# EAGLE board headstage-64-coax-adapter_panel (EAGLE 8.3.2), part 1 of 2
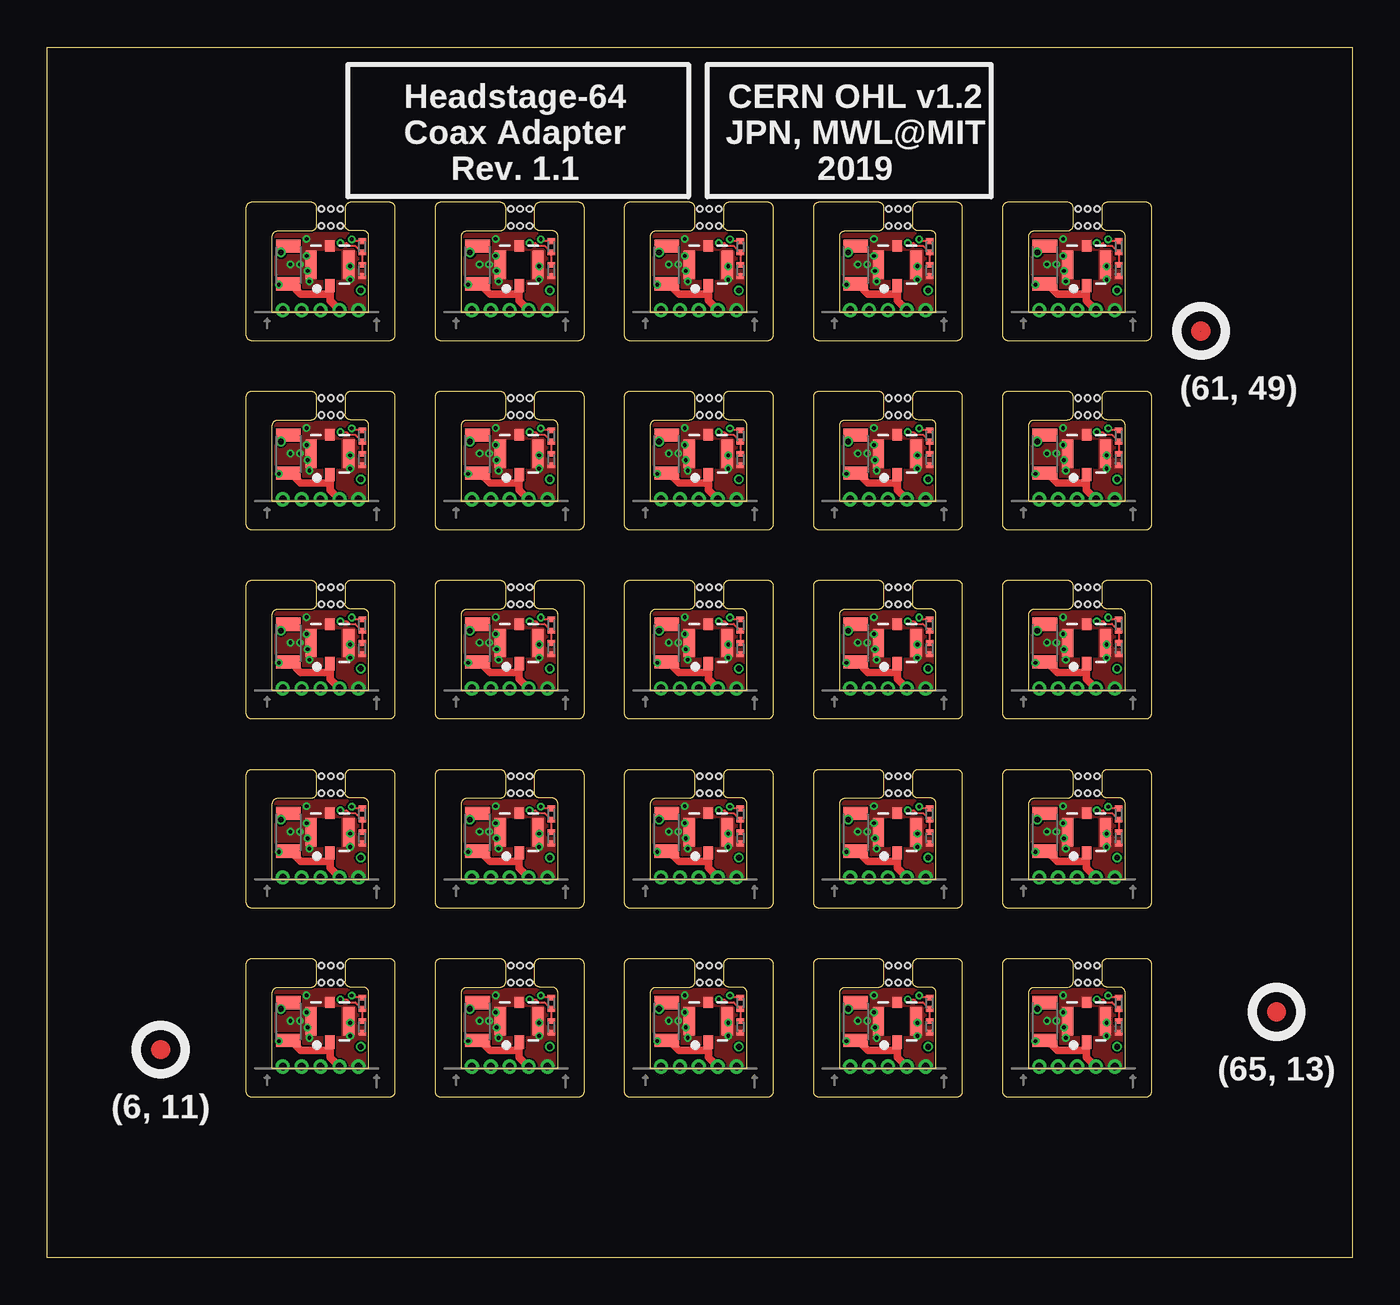
[diagram p0: board, top side]
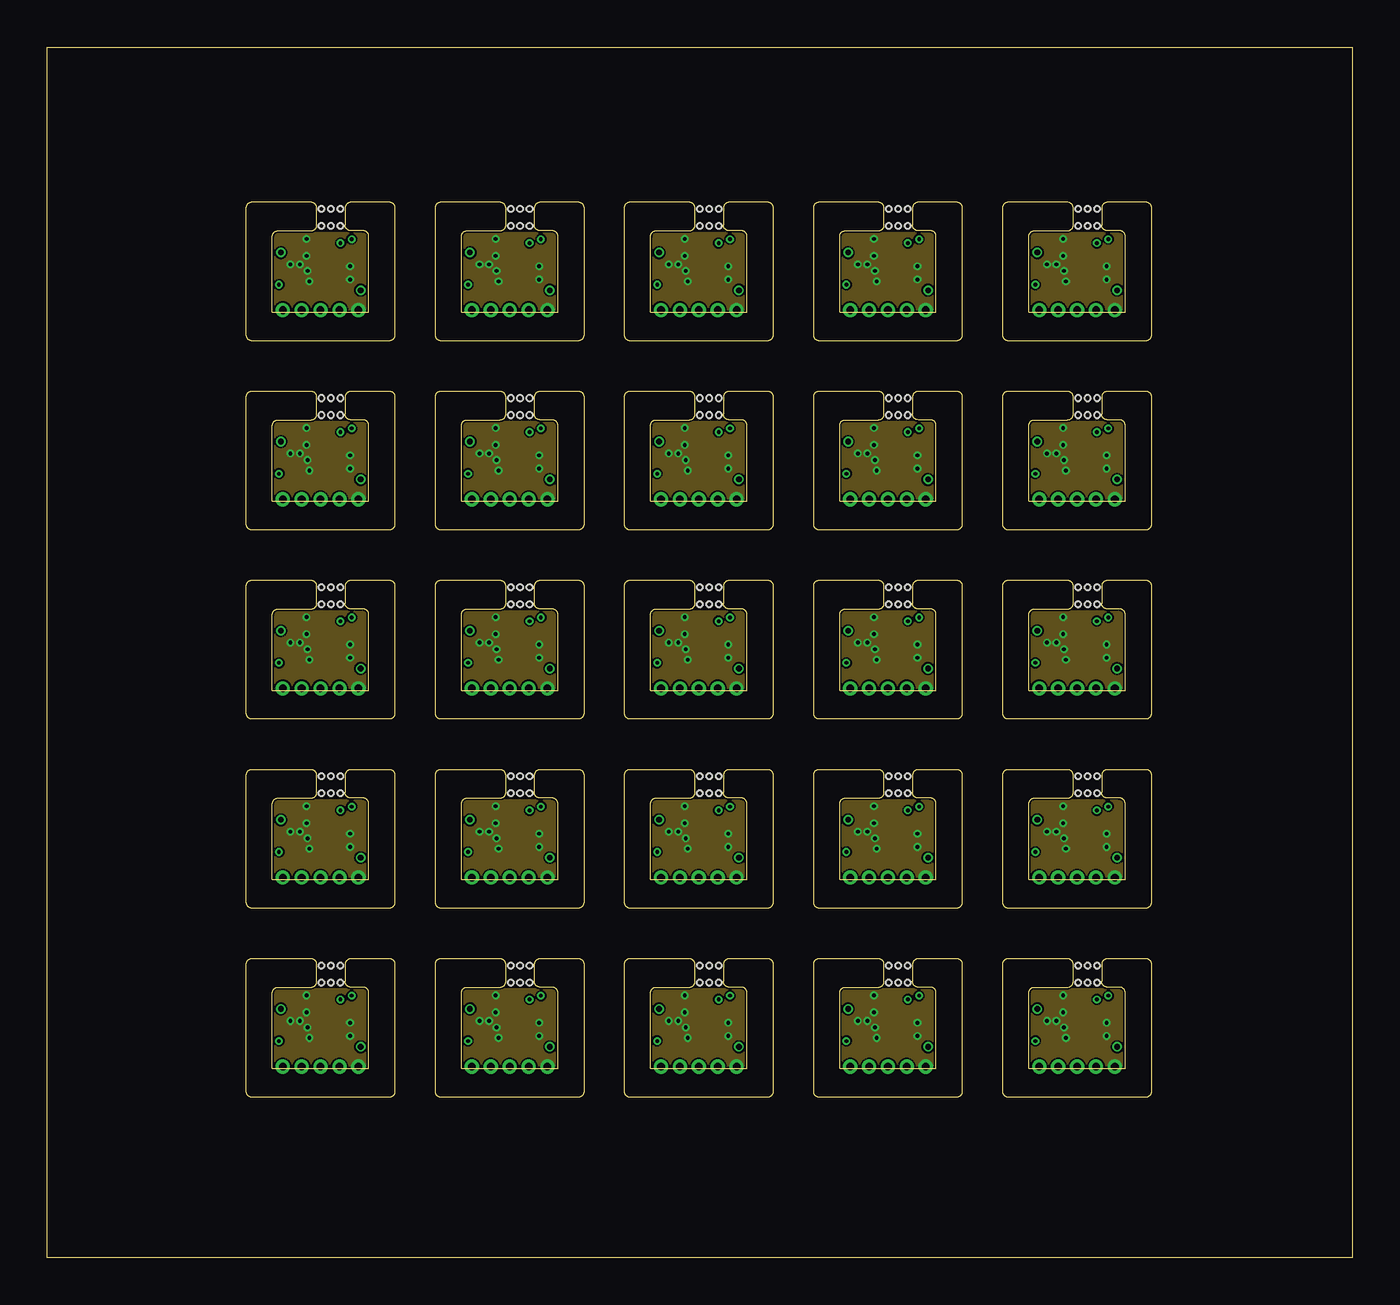
[diagram p1: board, inner layer Route2]
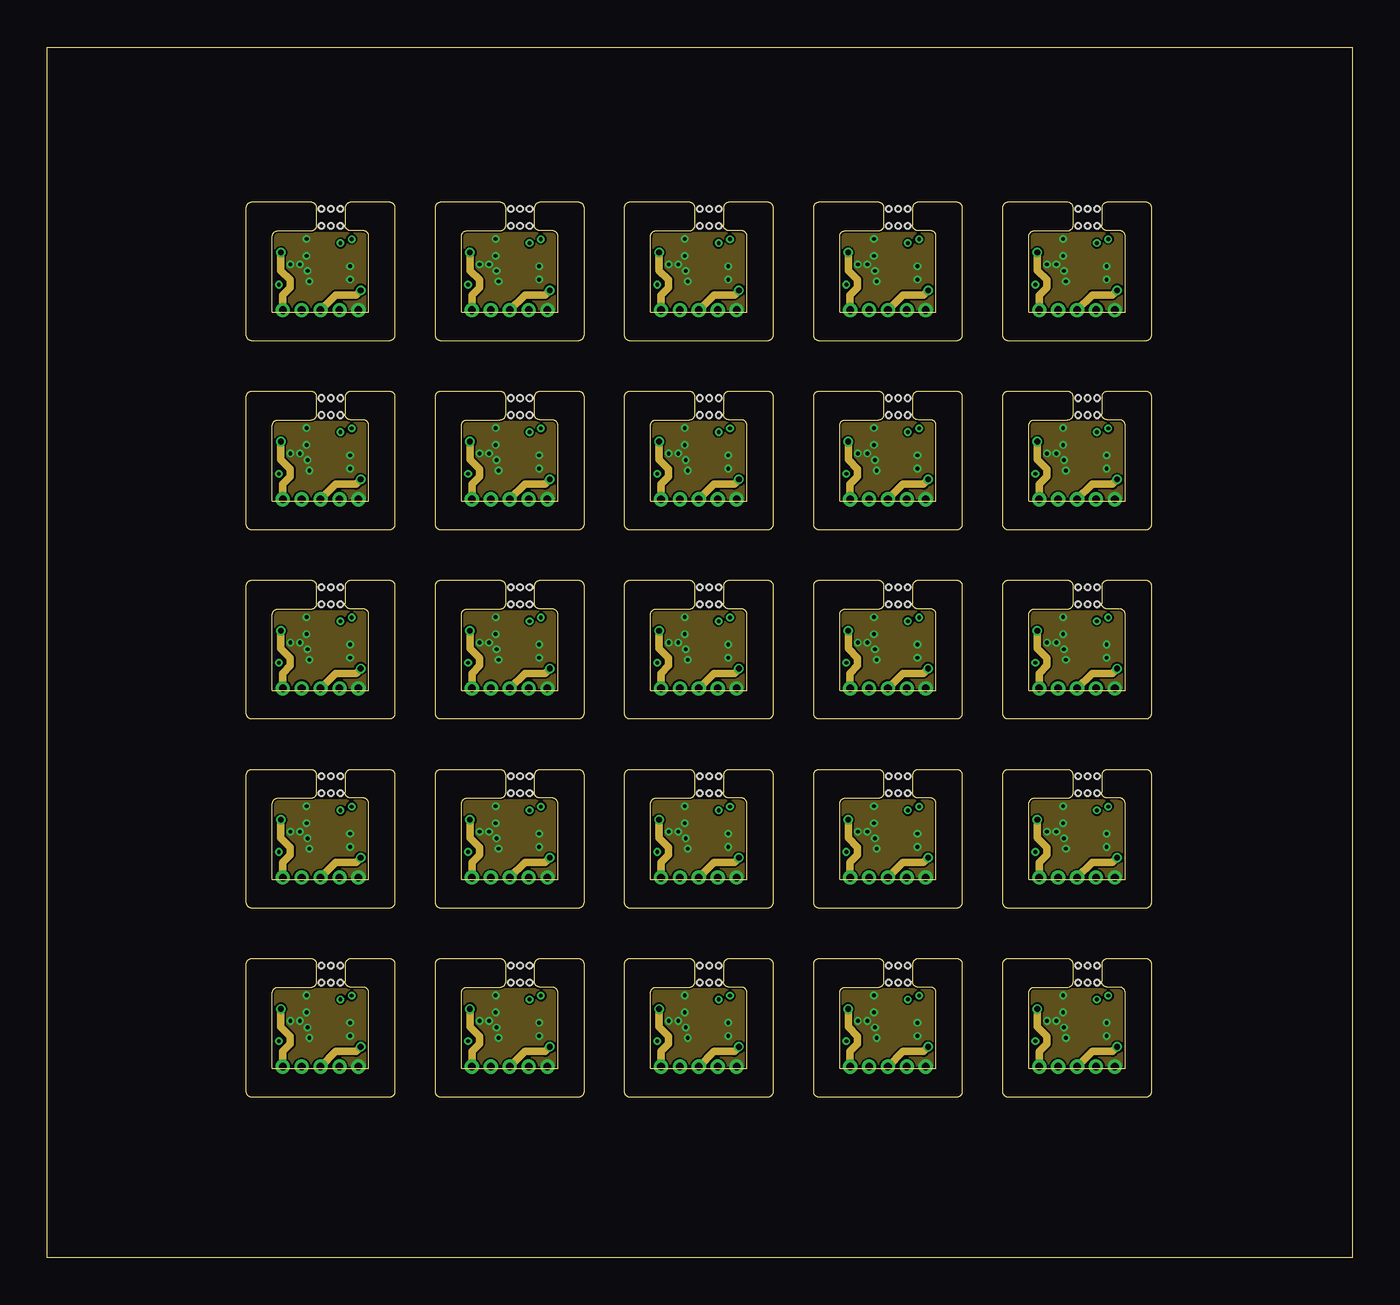
[diagram p2: board, inner layer Route15]
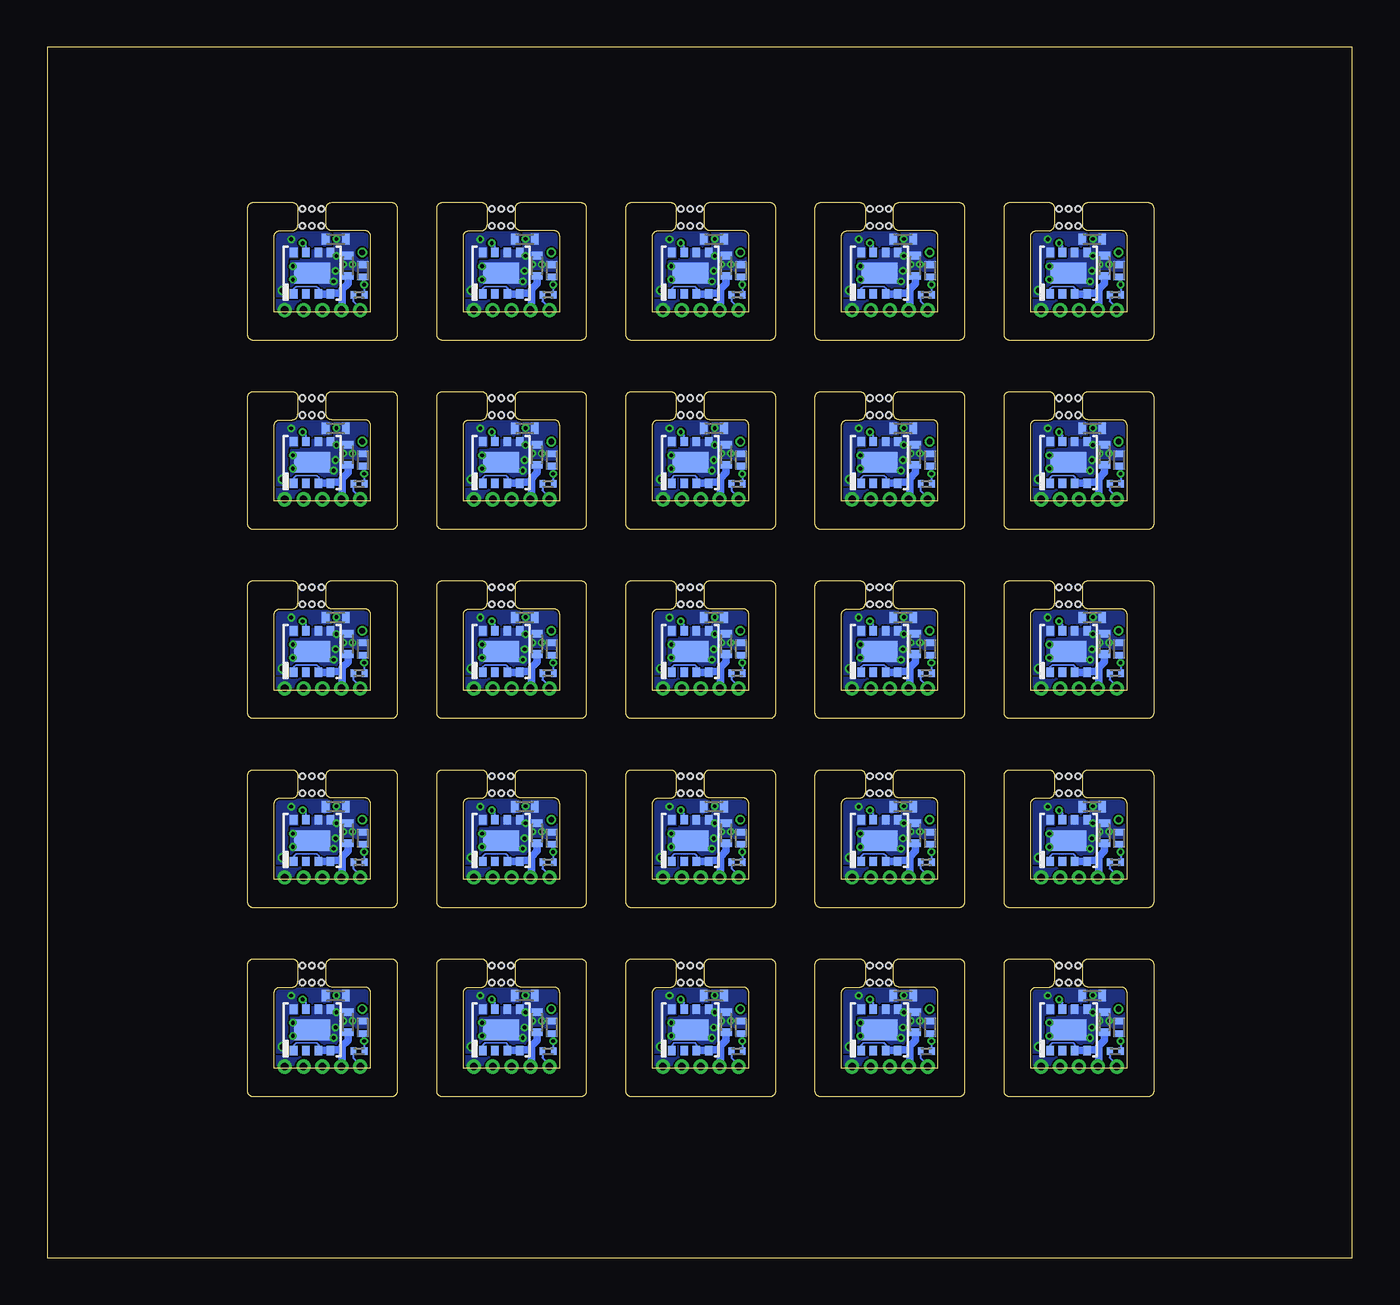
[diagram p3: board, bottom side, seen from below]

Size 69 x 64 mm. Coordinates in mm from the lower left corner, seen from the top.
Outline: 11.9,10 17,10 17,14 arc90 16.7,14.3 16.05,14.3 arc-90 15.75,14.6 15.75,15.5 arc-90 16.05,15.8 18.1,15.8 arc-90 18.4,15.5 18.4,8.8 arc-90 18.1,8.5 10.8,8.5 arc-90 10.5,8.8 10.5,15.5 arc-90 10.8,15.8 13.95,15.8 arc-90 14.25,15.5 14.25,14.6 arc-90 13.95,14.3 12.2,14.3 arc90 11.9,14 11.9,10
Outline: 0,0 0,64 69,64 69,0 0,0
Outline: 21.9,10 27,10 27,14 arc90 26.7,14.3 26.05,14.3 arc-90 25.75,14.6 25.75,15.5 arc-90 26.05,15.8 28.1,15.8 arc-90 28.4,15.5 28.4,8.8 arc-90 28.1,8.5 20.8,8.5 arc-90 20.5,8.8 20.5,15.5 arc-90 20.8,15.8 23.95,15.8 arc-90 24.25,15.5 24.25,14.6 arc-90 23.95,14.3 22.2,14.3 arc90 21.9,14 21.9,10
Outline: 31.9,10 37,10 37,14 arc90 36.7,14.3 36.05,14.3 arc-90 35.75,14.6 35.75,15.5 arc-90 36.05,15.8 38.1,15.8 arc-90 38.4,15.5 38.4,8.8 arc-90 38.1,8.5 30.8,8.5 arc-90 30.5,8.8 30.5,15.5 arc-90 30.8,15.8 33.95,15.8 arc-90 34.25,15.5 34.25,14.6 arc-90 33.95,14.3 32.2,14.3 arc90 31.9,14 31.9,10
Outline: 41.9,10 47,10 47,14 arc90 46.7,14.3 46.05,14.3 arc-90 45.75,14.6 45.75,15.5 arc-90 46.05,15.8 48.1,15.8 arc-90 48.4,15.5 48.4,8.8 arc-90 48.1,8.5 40.8,8.5 arc-90 40.5,8.8 40.5,15.5 arc-90 40.8,15.8 43.95,15.8 arc-90 44.25,15.5 44.25,14.6 arc-90 43.95,14.3 42.2,14.3 arc90 41.9,14 41.9,10
Outline: 51.9,10 57,10 57,14 arc90 56.7,14.3 56.05,14.3 arc-90 55.75,14.6 55.75,15.5 arc-90 56.05,15.8 58.1,15.8 arc-90 58.4,15.5 58.4,8.8 arc-90 58.1,8.5 50.8,8.5 arc-90 50.5,8.8 50.5,15.5 arc-90 50.8,15.8 53.95,15.8 arc-90 54.25,15.5 54.25,14.6 arc-90 53.95,14.3 52.2,14.3 arc90 51.9,14 51.9,10
Outline: 11.9,20 17,20 17,24 arc90 16.7,24.3 16.05,24.3 arc-90 15.75,24.6 15.75,25.5 arc-90 16.05,25.8 18.1,25.8 arc-90 18.4,25.5 18.4,18.8 arc-90 18.1,18.5 10.8,18.5 arc-90 10.5,18.8 10.5,25.5 arc-90 10.8,25.8 13.95,25.8 arc-90 14.25,25.5 14.25,24.6 arc-90 13.95,24.3 12.2,24.3 arc90 11.9,24 11.9,20
Outline: 21.9,20 27,20 27,24 arc90 26.7,24.3 26.05,24.3 arc-90 25.75,24.6 25.75,25.5 arc-90 26.05,25.8 28.1,25.8 arc-90 28.4,25.5 28.4,18.8 arc-90 28.1,18.5 20.8,18.5 arc-90 20.5,18.8 20.5,25.5 arc-90 20.8,25.8 23.95,25.8 arc-90 24.25,25.5 24.25,24.6 arc-90 23.95,24.3 22.2,24.3 arc90 21.9,24 21.9,20
Outline: 31.9,20 37,20 37,24 arc90 36.7,24.3 36.05,24.3 arc-90 35.75,24.6 35.75,25.5 arc-90 36.05,25.8 38.1,25.8 arc-90 38.4,25.5 38.4,18.8 arc-90 38.1,18.5 30.8,18.5 arc-90 30.5,18.8 30.5,25.5 arc-90 30.8,25.8 33.95,25.8 arc-90 34.25,25.5 34.25,24.6 arc-90 33.95,24.3 32.2,24.3 arc90 31.9,24 31.9,20
Outline: 41.9,20 47,20 47,24 arc90 46.7,24.3 46.05,24.3 arc-90 45.75,24.6 45.75,25.5 arc-90 46.05,25.8 48.1,25.8 arc-90 48.4,25.5 48.4,18.8 arc-90 48.1,18.5 40.8,18.5 arc-90 40.5,18.8 40.5,25.5 arc-90 40.8,25.8 43.95,25.8 arc-90 44.25,25.5 44.25,24.6 arc-90 43.95,24.3 42.2,24.3 arc90 41.9,24 41.9,20
Outline: 51.9,20 57,20 57,24 arc90 56.7,24.3 56.05,24.3 arc-90 55.75,24.6 55.75,25.5 arc-90 56.05,25.8 58.1,25.8 arc-90 58.4,25.5 58.4,18.8 arc-90 58.1,18.5 50.8,18.5 arc-90 50.5,18.8 50.5,25.5 arc-90 50.8,25.8 53.95,25.8 arc-90 54.25,25.5 54.25,24.6 arc-90 53.95,24.3 52.2,24.3 arc90 51.9,24 51.9,20
Outline: 11.9,30 17,30 17,34 arc90 16.7,34.3 16.05,34.3 arc-90 15.75,34.6 15.75,35.5 arc-90 16.05,35.8 18.1,35.8 arc-90 18.4,35.5 18.4,28.8 arc-90 18.1,28.5 10.8,28.5 arc-90 10.5,28.8 10.5,35.5 arc-90 10.8,35.8 13.95,35.8 arc-90 14.25,35.5 14.25,34.6 arc-90 13.95,34.3 12.2,34.3 arc90 11.9,34 11.9,30
Outline: 21.9,30 27,30 27,34 arc90 26.7,34.3 26.05,34.3 arc-90 25.75,34.6 25.75,35.5 arc-90 26.05,35.8 28.1,35.8 arc-90 28.4,35.5 28.4,28.8 arc-90 28.1,28.5 20.8,28.5 arc-90 20.5,28.8 20.5,35.5 arc-90 20.8,35.8 23.95,35.8 arc-90 24.25,35.5 24.25,34.6 arc-90 23.95,34.3 22.2,34.3 arc90 21.9,34 21.9,30
Outline: 31.9,30 37,30 37,34 arc90 36.7,34.3 36.05,34.3 arc-90 35.75,34.6 35.75,35.5 arc-90 36.05,35.8 38.1,35.8 arc-90 38.4,35.5 38.4,28.8 arc-90 38.1,28.5 30.8,28.5 arc-90 30.5,28.8 30.5,35.5 arc-90 30.8,35.8 33.95,35.8 arc-90 34.25,35.5 34.25,34.6 arc-90 33.95,34.3 32.2,34.3 arc90 31.9,34 31.9,30
Outline: 41.9,30 47,30 47,34 arc90 46.7,34.3 46.05,34.3 arc-90 45.75,34.6 45.75,35.5 arc-90 46.05,35.8 48.1,35.8 arc-90 48.4,35.5 48.4,28.8 arc-90 48.1,28.5 40.8,28.5 arc-90 40.5,28.8 40.5,35.5 arc-90 40.8,35.8 43.95,35.8 arc-90 44.25,35.5 44.25,34.6 arc-90 43.95,34.3 42.2,34.3 arc90 41.9,34 41.9,30
Outline: 51.9,30 57,30 57,34 arc90 56.7,34.3 56.05,34.3 arc-90 55.75,34.6 55.75,35.5 arc-90 56.05,35.8 58.1,35.8 arc-90 58.4,35.5 58.4,28.8 arc-90 58.1,28.5 50.8,28.5 arc-90 50.5,28.8 50.5,35.5 arc-90 50.8,35.8 53.95,35.8 arc-90 54.25,35.5 54.25,34.6 arc-90 53.95,34.3 52.2,34.3 arc90 51.9,34 51.9,30
Outline: 11.9,40 17,40 17,44 arc90 16.7,44.3 16.05,44.3 arc-90 15.75,44.6 15.75,45.5 arc-90 16.05,45.8 18.1,45.8 arc-90 18.4,45.5 18.4,38.8 arc-90 18.1,38.5 10.8,38.5 arc-90 10.5,38.8 10.5,45.5 arc-90 10.8,45.8 13.95,45.8 arc-90 14.25,45.5 14.25,44.6 arc-90 13.95,44.3 12.2,44.3 arc90 11.9,44 11.9,40
Outline: 21.9,40 27,40 27,44 arc90 26.7,44.3 26.05,44.3 arc-90 25.75,44.6 25.75,45.5 arc-90 26.05,45.8 28.1,45.8 arc-90 28.4,45.5 28.4,38.8 arc-90 28.1,38.5 20.8,38.5 arc-90 20.5,38.8 20.5,45.5 arc-90 20.8,45.8 23.95,45.8 arc-90 24.25,45.5 24.25,44.6 arc-90 23.95,44.3 22.2,44.3 arc90 21.9,44 21.9,40
Outline: 31.9,40 37,40 37,44 arc90 36.7,44.3 36.05,44.3 arc-90 35.75,44.6 35.75,45.5 arc-90 36.05,45.8 38.1,45.8 arc-90 38.4,45.5 38.4,38.8 arc-90 38.1,38.5 30.8,38.5 arc-90 30.5,38.8 30.5,45.5 arc-90 30.8,45.8 33.95,45.8 arc-90 34.25,45.5 34.25,44.6 arc-90 33.95,44.3 32.2,44.3 arc90 31.9,44 31.9,40
Outline: 41.9,40 47,40 47,44 arc90 46.7,44.3 46.05,44.3 arc-90 45.75,44.6 45.75,45.5 arc-90 46.05,45.8 48.1,45.8 arc-90 48.4,45.5 48.4,38.8 arc-90 48.1,38.5 40.8,38.5 arc-90 40.5,38.8 40.5,45.5 arc-90 40.8,45.8 43.95,45.8 arc-90 44.25,45.5 44.25,44.6 arc-90 43.95,44.3 42.2,44.3 arc90 41.9,44 41.9,40
Outline: 51.9,40 57,40 57,44 arc90 56.7,44.3 56.05,44.3 arc-90 55.75,44.6 55.75,45.5 arc-90 56.05,45.8 58.1,45.8 arc-90 58.4,45.5 58.4,38.8 arc-90 58.1,38.5 50.8,38.5 arc-90 50.5,38.8 50.5,45.5 arc-90 50.8,45.8 53.95,45.8 arc-90 54.25,45.5 54.25,44.6 arc-90 53.95,44.3 52.2,44.3 arc90 51.9,44 51.9,40
Outline: 11.9,50 17,50 17,54 arc90 16.7,54.3 16.05,54.3 arc-90 15.75,54.6 15.75,55.5 arc-90 16.05,55.8 18.1,55.8 arc-90 18.4,55.5 18.4,48.8 arc-90 18.1,48.5 10.8,48.5 arc-90 10.5,48.8 10.5,55.5 arc-90 10.8,55.8 13.95,55.8 arc-90 14.25,55.5 14.25,54.6 arc-90 13.95,54.3 12.2,54.3 arc90 11.9,54 11.9,50
Outline: 21.9,50 27,50 27,54 arc90 26.7,54.3 26.05,54.3 arc-90 25.75,54.6 25.75,55.5 arc-90 26.05,55.8 28.1,55.8 arc-90 28.4,55.5 28.4,48.8 arc-90 28.1,48.5 20.8,48.5 arc-90 20.5,48.8 20.5,55.5 arc-90 20.8,55.8 23.95,55.8 arc-90 24.25,55.5 24.25,54.6 arc-90 23.95,54.3 22.2,54.3 arc90 21.9,54 21.9,50
Outline: 31.9,50 37,50 37,54 arc90 36.7,54.3 36.05,54.3 arc-90 35.75,54.6 35.75,55.5 arc-90 36.05,55.8 38.1,55.8 arc-90 38.4,55.5 38.4,48.8 arc-90 38.1,48.5 30.8,48.5 arc-90 30.5,48.8 30.5,55.5 arc-90 30.8,55.8 33.95,55.8 arc-90 34.25,55.5 34.25,54.6 arc-90 33.95,54.3 32.2,54.3 arc90 31.9,54 31.9,50
Outline: 41.9,50 47,50 47,54 arc90 46.7,54.3 46.05,54.3 arc-90 45.75,54.6 45.75,55.5 arc-90 46.05,55.8 48.1,55.8 arc-90 48.4,55.5 48.4,48.8 arc-90 48.1,48.5 40.8,48.5 arc-90 40.5,48.8 40.5,55.5 arc-90 40.8,55.8 43.95,55.8 arc-90 44.25,55.5 44.25,54.6 arc-90 43.95,54.3 42.2,54.3 arc90 41.9,54 41.9,50
Outline: 51.9,50 57,50 57,54 arc90 56.7,54.3 56.05,54.3 arc-90 55.75,54.6 55.75,55.5 arc-90 56.05,55.8 58.1,55.8 arc-90 58.4,55.5 58.4,48.8 arc-90 58.1,48.5 50.8,48.5 arc-90 50.5,48.8 50.5,55.5 arc-90 50.8,55.8 53.95,55.8 arc-90 54.25,55.5 54.25,54.6 arc-90 53.95,54.3 52.2,54.3 arc90 51.9,54 51.9,50
Copper layers (1+2*15+16): Top 0.035mm / dielectric 0.2mm / Route2 0.0175mm / dielectric 1.065mm / Route15 0.0175mm / dielectric 0.2mm / Bottom 0.035mm
Design rules "jlcpcb-4-layer_JLC7628-stackup *": minimum track width 3.5mil, minimum drill 0.2mm, track to track 3.5mil, track to pad 3.5mil, pad to pad 3.5mil, via to via 3.5mil, smd to smd 0mil, copper to edge 0.1mm, drill to drill 3.5mil, minimum pad ring 4mil, minimum via ring 4mil, stop-mask expansion 1mil, vias tented up to drill 100mil, thermal gap 10mil
Holes 0.3 mm at 15,15.45 15,14.55 15.5,14.55 14.5,14.55 15.5,15.45 14.5,15.45 25,15.45 25,14.55 25.5,14.55 24.5,14.55 25.5,15.45 24.5,15.45 35,15.45 35,14.55 35.5,14.55 34.5,14.55 35.5,15.45 34.5,15.45 45,15.45 45,14.55 45.5,14.55 44.5,14.55 45.5,15.45 44.5,15.45 55,15.45 55,14.55 55.5,14.55 54.5,14.55 55.5,15.45 54.5,15.45 15,25.45 15,24.55 15.5,24.55 14.5,24.55 15.5,25.45 14.5,25.45 25,25.45 25,24.55 25.5,24.55 24.5,24.55 25.5,25.45 24.5,25.45 35,25.45 35,24.55 35.5,24.55 34.5,24.55 35.5,25.45 34.5,25.45 45,25.45 45,24.55 45.5,24.55 44.5,24.55 45.5,25.45 44.5,25.45 55,25.45 55,24.55 55.5,24.55 54.5,24.55 55.5,25.45 54.5,25.45 15,35.45 15,34.55 15.5,34.55 14.5,34.55 15.5,35.45 14.5,35.45 25,35.45 25,34.55 25.5,34.55 24.5,34.55 25.5,35.45 24.5,35.45 35,35.45 35,34.55 35.5,34.55 34.5,34.55 35.5,35.45 34.5,35.45 45,35.45 45,34.55 45.5,34.55 44.5,34.55 45.5,35.45 44.5,35.45 55,35.45 55,34.55 55.5,34.55 54.5,34.55 55.5,35.45 54.5,35.45 15,45.45 15,44.55 15.5,44.55 14.5,44.55 15.5,45.45 14.5,45.45 25,45.45 25,44.55 25.5,44.55 24.5,44.55 25.5,45.45 24.5,45.45 35,45.45 35,44.55 35.5,44.55 34.5,44.55 35.5,45.45 34.5,45.45 45,45.45 45,44.55 45.5,44.55 44.5,44.55 45.5,45.45 44.5,45.45 55,45.45 55,44.55 55.5,44.55 54.5,44.55 55.5,45.45 54.5,45.45 15,55.45 15,54.55 15.5,54.55 14.5,54.55 15.5,55.45 14.5,55.45 25,55.45 25,54.55 25.5,54.55 24.5,54.55 25.5,55.45 24.5,55.45 35,55.45 35,54.55 35.5,54.55 34.5,54.55 35.5,55.45 34.5,55.45 45,55.45 45,54.55 45.5,54.55 44.5,54.55 45.5,55.45 44.5,55.45 55,55.45 55,54.55 55.5,54.55 54.5,54.55 55.5,55.45 54.5,55.45

## Footprints (pad centres in the part's own frame; a part is rotated, then mirrored left to right if it is on the bottom)
0402T = smd 0.4 x 0.6: 1 -0.533,0; 2 0.533,0
0402T-DFN = smd 0.35 x 0.6: A -0.325,0; C 0.325,0
X_FL_R_SMT_1(02) = smd 0.5 x 0.7: P$1 0,-1.1 | smd 0.6 x 1.5: P$2 -1,0; P$4 1,0 | smd 0.5 x 0.6: P$3 0,1
HEADSTAGE-64-REV1.4-DAUGHTER-CARD-CASTELLATED = drill 0.4 pad 0.75: 1 -2.55,0.1; 2 -1.55,0.1; 3 -0.55,0.1; 4 0.45,0.1; 5 1.45,0.1
0805T = smd 0.7 x 1.3: 1 -1,0; 2 1,0
0201T = smd 0.3 x 0.4: 1 -0.3,0; 2 0.3,0
MICROSIP9-2.8X3 = smd 0.5 x 0.4: 1 -1.1,0.975; 2 -1.1,0.325; 3 -1.1,-0.325; 4 -1.1,-0.975; 5 1.1,-0.325; 6 1.1,-0.975; 7 1.1,0.325; 8 1.1,0.975 | smd 1.1 x 1.9: PAD 0,0

## Placement (x,y rotation side)
C1  10uF  [0402T]  13.1,12.45 90 bottom
C2  10uF  [0402T]  13.75,13.85 0 bottom
C3  10uF  [0402T]  23.75,13.85 0 bottom
C4  10uF  [0402T]  23.1,12.45 90 bottom
C5  10uF  [0402T]  33.75,13.85 0 bottom
C6  10uF  [0402T]  33.1,12.45 90 bottom
C7  10uF  [0402T]  43.75,13.85 0 bottom
C8  10uF  [0402T]  43.1,12.45 90 bottom
C9  10uF  [0402T]  53.75,13.85 0 bottom
C10  10uF  [0402T]  53.1,12.45 90 bottom
C11  10uF  [0402T]  13.75,23.85 0 bottom
C12  10uF  [0402T]  13.1,22.45 90 bottom
C13  10uF  [0402T]  23.75,23.85 0 bottom
C14  10uF  [0402T]  23.1,22.45 90 bottom
C15  10uF  [0402T]  33.75,23.85 0 bottom
C16  10uF  [0402T]  33.1,22.45 90 bottom
C17  10uF  [0402T]  43.75,23.85 0 bottom
C18  10uF  [0402T]  43.1,22.45 90 bottom
C19  10uF  [0402T]  53.75,23.85 0 bottom
C20  10uF  [0402T]  53.1,22.45 90 bottom
C21  10uF  [0402T]  13.75,33.85 0 bottom
C22  10uF  [0402T]  13.1,32.45 90 bottom
C23  10uF  [0402T]  23.75,33.85 0 bottom
C24  10uF  [0402T]  23.1,32.45 90 bottom
C25  10uF  [0402T]  33.75,33.85 0 bottom
C26  10uF  [0402T]  33.1,32.45 90 bottom
C27  10uF  [0402T]  43.75,33.85 0 bottom
C28  10uF  [0402T]  43.1,32.45 90 bottom
C29  10uF  [0402T]  53.75,33.85 0 bottom
C30  10uF  [0402T]  53.1,32.45 90 bottom
C31  10uF  [0402T]  13.75,43.85 0 bottom
C32  10uF  [0402T]  13.1,42.45 90 bottom
C33  10uF  [0402T]  23.75,43.85 0 bottom
C34  10uF  [0402T]  23.1,42.45 90 bottom
C35  10uF  [0402T]  33.75,43.85 0 bottom
C36  10uF  [0402T]  33.1,42.45 90 bottom
C37  10uF  [0402T]  43.75,43.85 0 bottom
C38  10uF  [0402T]  43.1,42.45 90 bottom
C39  10uF  [0402T]  53.75,43.85 0 bottom
C40  10uF  [0402T]  53.1,42.45 90 bottom
C41  10uF  [0402T]  13.75,53.85 0 bottom
C42  10uF  [0402T]  13.1,52.45 90 bottom
C43  10uF  [0402T]  23.75,53.85 0 bottom
C44  10uF  [0402T]  23.1,52.45 90 bottom
C45  10uF  [0402T]  33.75,53.85 0 bottom
C46  10uF  [0402T]  33.1,52.45 90 bottom
C47  10uF  [0402T]  43.75,53.85 0 bottom
C48  10uF  [0402T]  43.1,52.45 90 bottom
C49  10uF  [0402T]  53.75,53.85 0 bottom
C50  10uF  [0402T]  53.1,52.45 90 bottom
D1  SESD0402X1UN-0020-090  [0402T-DFN]  12.32,12.18 270 bottom
D2  SESD0402X1UN-0020-090  [0402T-DFN]  22.32,12.18 270 bottom
D3  SESD0402X1UN-0020-090  [0402T-DFN]  32.32,12.18 270 bottom
D4  SESD0402X1UN-0020-090  [0402T-DFN]  42.32,12.18 270 bottom
D5  SESD0402X1UN-0020-090  [0402T-DFN]  52.32,12.18 270 bottom
D6  SESD0402X1UN-0020-090  [0402T-DFN]  12.32,22.18 270 bottom
D7  SESD0402X1UN-0020-090  [0402T-DFN]  22.32,22.18 270 bottom
D8  SESD0402X1UN-0020-090  [0402T-DFN]  32.32,22.18 270 bottom
D9  SESD0402X1UN-0020-090  [0402T-DFN]  42.32,22.18 270 bottom
D10  SESD0402X1UN-0020-090  [0402T-DFN]  52.32,22.18 270 bottom
D11  SESD0402X1UN-0020-090  [0402T-DFN]  12.32,32.18 270 bottom
D12  SESD0402X1UN-0020-090  [0402T-DFN]  22.32,32.18 270 bottom
D13  SESD0402X1UN-0020-090  [0402T-DFN]  32.32,32.18 270 bottom
D14  SESD0402X1UN-0020-090  [0402T-DFN]  42.32,32.18 270 bottom
D15  SESD0402X1UN-0020-090  [0402T-DFN]  52.32,32.18 270 bottom
D16  SESD0402X1UN-0020-090  [0402T-DFN]  12.32,42.18 270 bottom
D17  SESD0402X1UN-0020-090  [0402T-DFN]  22.32,42.18 270 bottom
D18  SESD0402X1UN-0020-090  [0402T-DFN]  32.32,42.18 270 bottom
D19  SESD0402X1UN-0020-090  [0402T-DFN]  42.32,42.18 270 bottom
D20  SESD0402X1UN-0020-090  [0402T-DFN]  52.32,42.18 270 bottom
D21  SESD0402X1UN-0020-090  [0402T-DFN]  12.32,52.18 270 bottom
D22  SESD0402X1UN-0020-090  [0402T-DFN]  22.32,52.18 270 bottom
D23  SESD0402X1UN-0020-090  [0402T-DFN]  32.32,52.18 270 bottom
D24  SESD0402X1UN-0020-090  [0402T-DFN]  42.32,52.18 270 bottom
D25  SESD0402X1UN-0020-090  [0402T-DFN]  52.32,52.18 270 bottom
E$1  [FIDUCIAL]  65,13 0 top
E$2  [FIDUCIAL]  61,49 0 top
E$4  [FIDUCIAL]  6,11 0 top
J1  X.FL-R-SMT-1(02)  [X_FL_R_SMT_1(02)]  14.95,12.5 0 top
J2  [HEADSTAGE-64-REV1.4-DAUGHTER-CARD-CASTELLATED]  15,10 0 top
J3  X.FL-R-SMT-1(02)  [X_FL_R_SMT_1(02)]  24.95,12.5 0 top
J4  [HEADSTAGE-64-REV1.4-DAUGHTER-CARD-CASTELLATED]  25,10 0 top
J5  X.FL-R-SMT-1(02)  [X_FL_R_SMT_1(02)]  34.95,12.5 0 top
J6  [HEADSTAGE-64-REV1.4-DAUGHTER-CARD-CASTELLATED]  35,10 0 top
J7  X.FL-R-SMT-1(02)  [X_FL_R_SMT_1(02)]  44.95,12.5 0 top
J8  [HEADSTAGE-64-REV1.4-DAUGHTER-CARD-CASTELLATED]  45,10 0 top
J9  X.FL-R-SMT-1(02)  [X_FL_R_SMT_1(02)]  54.95,12.5 0 top
J10  [HEADSTAGE-64-REV1.4-DAUGHTER-CARD-CASTELLATED]  55,10 0 top
J11  X.FL-R-SMT-1(02)  [X_FL_R_SMT_1(02)]  14.95,22.5 0 top
J12  [HEADSTAGE-64-REV1.4-DAUGHTER-CARD-CASTELLATED]  15,20 0 top
J13  X.FL-R-SMT-1(02)  [X_FL_R_SMT_1(02)]  24.95,22.5 0 top
J14  [HEADSTAGE-64-REV1.4-DAUGHTER-CARD-CASTELLATED]  25,20 0 top
J15  X.FL-R-SMT-1(02)  [X_FL_R_SMT_1(02)]  34.95,22.5 0 top
J16  [HEADSTAGE-64-REV1.4-DAUGHTER-CARD-CASTELLATED]  35,20 0 top
J17  X.FL-R-SMT-1(02)  [X_FL_R_SMT_1(02)]  44.95,22.5 0 top
J18  [HEADSTAGE-64-REV1.4-DAUGHTER-CARD-CASTELLATED]  45,20 0 top
J19  X.FL-R-SMT-1(02)  [X_FL_R_SMT_1(02)]  54.95,22.5 0 top
J20  [HEADSTAGE-64-REV1.4-DAUGHTER-CARD-CASTELLATED]  55,20 0 top
J21  X.FL-R-SMT-1(02)  [X_FL_R_SMT_1(02)]  14.95,32.5 0 top
J22  [HEADSTAGE-64-REV1.4-DAUGHTER-CARD-CASTELLATED]  15,30 0 top
J23  X.FL-R-SMT-1(02)  [X_FL_R_SMT_1(02)]  24.95,32.5 0 top
J24  [HEADSTAGE-64-REV1.4-DAUGHTER-CARD-CASTELLATED]  25,30 0 top
J25  X.FL-R-SMT-1(02)  [X_FL_R_SMT_1(02)]  34.95,32.5 0 top
J26  [HEADSTAGE-64-REV1.4-DAUGHTER-CARD-CASTELLATED]  35,30 0 top
J27  X.FL-R-SMT-1(02)  [X_FL_R_SMT_1(02)]  44.95,32.5 0 top
J28  [HEADSTAGE-64-REV1.4-DAUGHTER-CARD-CASTELLATED]  45,30 0 top
J29  X.FL-R-SMT-1(02)  [X_FL_R_SMT_1(02)]  54.95,32.5 0 top
J30  [HEADSTAGE-64-REV1.4-DAUGHTER-CARD-CASTELLATED]  55,30 0 top
J31  X.FL-R-SMT-1(02)  [X_FL_R_SMT_1(02)]  14.95,42.5 0 top
J32  [HEADSTAGE-64-REV1.4-DAUGHTER-CARD-CASTELLATED]  15,40 0 top
J33  X.FL-R-SMT-1(02)  [X_FL_R_SMT_1(02)]  24.95,42.5 0 top
J34  [HEADSTAGE-64-REV1.4-DAUGHTER-CARD-CASTELLATED]  25,40 0 top
J35  X.FL-R-SMT-1(02)  [X_FL_R_SMT_1(02)]  34.95,42.5 0 top
J36  [HEADSTAGE-64-REV1.4-DAUGHTER-CARD-CASTELLATED]  35,40 0 top
J37  X.FL-R-SMT-1(02)  [X_FL_R_SMT_1(02)]  44.95,42.5 0 top
J38  [HEADSTAGE-64-REV1.4-DAUGHTER-CARD-CASTELLATED]  45,40 0 top
J39  X.FL-R-SMT-1(02)  [X_FL_R_SMT_1(02)]  54.95,42.5 0 top
J40  [HEADSTAGE-64-REV1.4-DAUGHTER-CARD-CASTELLATED]  55,40 0 top
J41  X.FL-R-SMT-1(02)  [X_FL_R_SMT_1(02)]  14.95,52.5 0 top
J42  [HEADSTAGE-64-REV1.4-DAUGHTER-CARD-CASTELLATED]  15,50 0 top
J43  X.FL-R-SMT-1(02)  [X_FL_R_SMT_1(02)]  24.95,52.5 0 top
J44  [HEADSTAGE-64-REV1.4-DAUGHTER-CARD-CASTELLATED]  25,50 0 top
J45  X.FL-R-SMT-1(02)  [X_FL_R_SMT_1(02)]  34.95,52.5 0 top
J46  [HEADSTAGE-64-REV1.4-DAUGHTER-CARD-CASTELLATED]  35,50 0 top
J47  X.FL-R-SMT-1(02)  [X_FL_R_SMT_1(02)]  44.95,52.5 0 top
J48  [HEADSTAGE-64-REV1.4-DAUGHTER-CARD-CASTELLATED]  45,50 0 top
J49  X.FL-R-SMT-1(02)  [X_FL_R_SMT_1(02)]  54.95,52.5 0 top
J50  [HEADSTAGE-64-REV1.4-DAUGHTER-CARD-CASTELLATED]  55,50 0 top
L1  CIG21L4R7MNE  [0805T]  12.75,12.49 90 top
L2  CIG21L4R7MNE  [0805T]  22.75,12.49 90 top
L3  CIG21L4R7MNE  [0805T]  32.75,12.49 90 top
L4  CIG21L4R7MNE  [0805T]  42.75,12.49 90 top
L5  CIG21L4R7MNE  [0805T]  52.75,12.49 90 top
L6  CIG21L4R7MNE  [0805T]  12.75,22.49 90 top
L7  CIG21L4R7MNE  [0805T]  22.75,22.49 90 top
L8  CIG21L4R7MNE  [0805T]  32.75,22.49 90 top
L9  CIG21L4R7MNE  [0805T]  42.75,22.49 90 top
L10  CIG21L4R7MNE  [0805T]  52.75,22.49 90 top
L11  CIG21L4R7MNE  [0805T]  12.75,32.49 90 top
L12  CIG21L4R7MNE  [0805T]  22.75,32.49 90 top
L13  CIG21L4R7MNE  [0805T]  32.75,32.49 90 top
L14  CIG21L4R7MNE  [0805T]  42.75,32.49 90 top
L15  CIG21L4R7MNE  [0805T]  52.75,32.49 90 top
L16  CIG21L4R7MNE  [0805T]  12.75,42.49 90 top
L17  CIG21L4R7MNE  [0805T]  22.75,42.49 90 top
L18  CIG21L4R7MNE  [0805T]  32.75,42.49 90 top
L19  CIG21L4R7MNE  [0805T]  42.75,42.49 90 top
L20  CIG21L4R7MNE  [0805T]  52.75,42.49 90 top
L21  CIG21L4R7MNE  [0805T]  12.75,52.49 90 top
L22  CIG21L4R7MNE  [0805T]  22.75,52.49 90 top
L23  CIG21L4R7MNE  [0805T]  32.75,52.49 90 top
L24  CIG21L4R7MNE  [0805T]  42.75,52.49 90 top
L25  CIG21L4R7MNE  [0805T]  52.75,52.49 90 top
R1  1k  [0201T]  12.52,10.91 180 bottom
R2  143k  [0201T]  16.65,13.45 90 top
R3  24k  [0201T]  16.65,12.2 90 top
R4  1k  [0201T]  22.52,10.91 180 bottom
R5  143k  [0201T]  26.65,13.45 90 top
R6  24k  [0201T]  26.65,12.2 90 top
R7  1k  [0201T]  32.52,10.91 180 bottom
R8  143k  [0201T]  36.65,13.45 90 top
R9  24k  [0201T]  36.65,12.2 90 top
R10  1k  [0201T]  42.52,10.91 180 bottom
R11  143k  [0201T]  46.65,13.45 90 top
R12  24k  [0201T]  46.65,12.2 90 top
R13  1k  [0201T]  52.52,10.91 180 bottom
R14  143k  [0201T]  56.65,13.45 90 top
R15  24k  [0201T]  56.65,12.2 90 top
R16  1k  [0201T]  12.52,20.91 180 bottom
R17  143k  [0201T]  16.65,23.45 90 top
R18  24k  [0201T]  16.65,22.2 90 top
R19  1k  [0201T]  22.52,20.91 180 bottom
R20  143k  [0201T]  26.65,23.45 90 top
R21  24k  [0201T]  26.65,22.2 90 top
R22  1k  [0201T]  32.52,20.91 180 bottom
R23  143k  [0201T]  36.65,23.45 90 top
R24  24k  [0201T]  36.65,22.2 90 top
R25  1k  [0201T]  42.52,20.91 180 bottom
R26  143k  [0201T]  46.65,23.45 90 top
R27  24k  [0201T]  46.65,22.2 90 top
R28  1k  [0201T]  52.52,20.91 180 bottom
R29  143k  [0201T]  56.65,23.45 90 top
R30  24k  [0201T]  56.65,22.2 90 top
R31  1k  [0201T]  12.52,30.91 180 bottom
R32  143k  [0201T]  16.65,33.45 90 top
R33  24k  [0201T]  16.65,32.2 90 top
R34  1k  [0201T]  22.52,30.91 180 bottom
R35  143k  [0201T]  26.65,33.45 90 top
R36  24k  [0201T]  26.65,32.2 90 top
R37  1k  [0201T]  32.52,30.91 180 bottom
R38  143k  [0201T]  36.65,33.45 90 top
R39  24k  [0201T]  36.65,32.2 90 top
R40  1k  [0201T]  42.52,30.91 180 bottom
R41  143k  [0201T]  46.65,33.45 90 top
R42  24k  [0201T]  46.65,32.2 90 top
R43  1k  [0201T]  52.52,30.91 180 bottom
R44  143k  [0201T]  56.65,33.45 90 top
R45  24k  [0201T]  56.65,32.2 90 top
R46  1k  [0201T]  12.52,40.91 180 bottom
R47  143k  [0201T]  16.65,43.45 90 top
R48  24k  [0201T]  16.65,42.2 90 top
R49  1k  [0201T]  22.52,40.91 180 bottom
R50  143k  [0201T]  26.65,43.45 90 top
R51  24k  [0201T]  26.65,42.2 90 top
R52  1k  [0201T]  32.52,40.91 180 bottom
R53  143k  [0201T]  36.65,43.45 90 top
R54  24k  [0201T]  36.65,42.2 90 top
R55  1k  [0201T]  42.52,40.91 180 bottom
R56  143k  [0201T]  46.65,43.45 90 top
R57  24k  [0201T]  46.65,42.2 90 top
R58  1k  [0201T]  52.52,40.91 180 bottom
R59  143k  [0201T]  56.65,43.45 90 top
R60  24k  [0201T]  56.65,42.2 90 top
R61  1k  [0201T]  12.52,50.91 180 bottom
R62  143k  [0201T]  16.65,53.45 90 top
R63  24k  [0201T]  16.65,52.2 90 top
R64  1k  [0201T]  22.52,50.91 180 bottom
R65  143k  [0201T]  26.65,53.45 90 top
R66  24k  [0201T]  26.65,52.2 90 top
R67  1k  [0201T]  32.52,50.91 180 bottom
R68  143k  [0201T]  36.65,53.45 90 top
R69  24k  [0201T]  36.65,52.2 90 top
R70  1k  [0201T]  42.52,50.91 180 bottom
R71  143k  [0201T]  46.65,53.45 90 top
R72  24k  [0201T]  46.65,52.2 90 top
R73  1k  [0201T]  52.52,50.91 180 bottom
R74  143k  [0201T]  56.65,53.45 90 top
R75  24k  [0201T]  56.65,52.2 90 top
U1  TPS82085  [MICROSIP9-2.8X3]  15,12.05 90 bottom
U2  TPS82085  [MICROSIP9-2.8X3]  25,12.05 90 bottom
U3  TPS82085  [MICROSIP9-2.8X3]  35,12.05 90 bottom
U4  TPS82085  [MICROSIP9-2.8X3]  45,12.05 90 bottom
U5  TPS82085  [MICROSIP9-2.8X3]  55,12.05 90 bottom
U6  TPS82085  [MICROSIP9-2.8X3]  15,22.05 90 bottom
U7  TPS82085  [MICROSIP9-2.8X3]  25,22.05 90 bottom
U8  TPS82085  [MICROSIP9-2.8X3]  35,22.05 90 bottom
U9  TPS82085  [MICROSIP9-2.8X3]  45,22.05 90 bottom
U10  TPS82085  [MICROSIP9-2.8X3]  55,22.05 90 bottom
U11  TPS82085  [MICROSIP9-2.8X3]  15,32.05 90 bottom
U12  TPS82085  [MICROSIP9-2.8X3]  25,32.05 90 bottom
U13  TPS82085  [MICROSIP9-2.8X3]  35,32.05 90 bottom
U14  TPS82085  [MICROSIP9-2.8X3]  45,32.05 90 bottom
U15  TPS82085  [MICROSIP9-2.8X3]  55,32.05 90 bottom
U16  TPS82085  [MICROSIP9-2.8X3]  15,42.05 90 bottom
U17  TPS82085  [MICROSIP9-2.8X3]  25,42.05 90 bottom
U18  TPS82085  [MICROSIP9-2.8X3]  35,42.05 90 bottom
U19  TPS82085  [MICROSIP9-2.8X3]  45,42.05 90 bottom
U20  TPS82085  [MICROSIP9-2.8X3]  55,42.05 90 bottom
U21  TPS82085  [MICROSIP9-2.8X3]  15,52.05 90 bottom
U22  TPS82085  [MICROSIP9-2.8X3]  25,52.05 90 bottom
U23  TPS82085  [MICROSIP9-2.8X3]  35,52.05 90 bottom
U24  TPS82085  [MICROSIP9-2.8X3]  45,52.05 90 bottom
U25  TPS82085  [MICROSIP9-2.8X3]  55,52.05 90 bottom

## Library data of the parts
C1-C50 = jonnew; PARTNO: CL05A475MO5NUNC
D1-D25 J1-J50 L1-L25 R1-R75 U1-U25 = jonnew
E$1 E$2 E$4 = fiducial

## Nets
GND: C1.2 C2.2 D1.A J1.P$2 J1.P$3 J1.P$4 J2.5 R3.1 U1.5 U1.6 U1.PAD
GND2: C3.2 C4.2 D2.A J3.P$2 J3.P$3 J3.P$4 J4.5 R6.1 U2.5 U2.6 U2.PAD
GND10: C5.2 C6.2 D3.A J5.P$2 J5.P$3 J5.P$4 J6.5 R9.1 U3.5 U3.6 U3.PAD
GND12: C7.2 C8.2 D4.A J7.P$2 J7.P$3 J7.P$4 J8.5 R12.1 U4.5 U4.6 U4.PAD
GND14: C9.2 C10.2 D5.A J9.P$2 J9.P$3 J9.P$4 J10.5 R15.1 U5.5 U5.6 U5.PAD
GND16: C11.2 C12.2 D6.A J11.P$2 J11.P$3 J11.P$4 J12.5 R18.1 U6.5 U6.6 U6.PAD
GND18: C13.2 C14.2 D7.A J13.P$2 J13.P$3 J13.P$4 J14.5 R21.1 U7.5 U7.6 U7.PAD
GND20: C15.2 C16.2 D8.A J15.P$2 J15.P$3 J15.P$4 J16.5 R24.1 U8.5 U8.6 U8.PAD
GND22: C17.2 C18.2 D9.A J17.P$2 J17.P$3 J17.P$4 J18.5 R27.1 U9.5 U9.6 U9.PAD
GND24: C19.2 C20.2 D10.A J19.P$2 J19.P$3 J19.P$4 J20.5 R30.1 U10.5 U10.6 U10.PAD
GND26: C21.2 C22.2 D11.A J21.P$2 J21.P$3 J21.P$4 J22.5 R33.1 U11.5 U11.6 U11.PAD
GND28: C23.2 C24.2 D12.A J23.P$2 J23.P$3 J23.P$4 J24.5 R36.1 U12.5 U12.6 U12.PAD
GND30: C25.2 C26.2 D13.A J25.P$2 J25.P$3 J25.P$4 J26.5 R39.1 U13.5 U13.6 U13.PAD
GND32: C27.2 C28.2 D14.A J27.P$2 J27.P$3 J27.P$4 J28.5 R42.1 U14.5 U14.6 U14.PAD
GND34: C29.2 C30.2 D15.A J29.P$2 J29.P$3 J29.P$4 J30.5 R45.1 U15.5 U15.6 U15.PAD
GND36: C31.2 C32.2 D16.A J31.P$2 J31.P$3 J31.P$4 J32.5 R48.1 U16.5 U16.6 U16.PAD
GND38: C33.2 C34.2 D17.A J33.P$2 J33.P$3 J33.P$4 J34.5 R51.1 U17.5 U17.6 U17.PAD
GND40: C35.2 C36.2 D18.A J35.P$2 J35.P$3 J35.P$4 J36.5 R54.1 U18.5 U18.6 U18.PAD
GND42: C37.2 C38.2 D19.A J37.P$2 J37.P$3 J37.P$4 J38.5 R57.1 U19.5 U19.6 U19.PAD
GND44: C39.2 C40.2 D20.A J39.P$2 J39.P$3 J39.P$4 J40.5 R60.1 U20.5 U20.6 U20.PAD
GND45: C41.2 C42.2 D21.A J41.P$2 J41.P$3 J41.P$4 J42.5 R63.1 U21.5 U21.6 U21.PAD
GND46: C43.2 C44.2 D22.A J43.P$2 J43.P$3 J43.P$4 J44.5 R66.1 U22.5 U22.6 U22.PAD
GND47: C45.2 C46.2 D23.A J45.P$2 J45.P$3 J45.P$4 J46.5 R69.1 U23.5 U23.6 U23.PAD
GND48: C47.2 C48.2 D24.A J47.P$2 J47.P$3 J47.P$4 J48.5 R72.1 U24.5 U24.6 U24.PAD
GND49: C49.2 C50.2 D25.A J49.P$2 J49.P$3 J49.P$4 J50.5 R75.1 U25.5 U25.6 U25.PAD
N$1: J4.1 L2.2 R4.2
N$2: R2.1 R3.2 U1.7
N$3: R5.1 R6.2 U2.7
N$4: J6.1 L3.2 R7.2
N$5: R8.1 R9.2 U3.7
N$6: J8.1 L4.2 R10.2
N$7: R11.1 R12.2 U4.7
N$8: J10.1 L5.2 R13.2
N$9: R14.1 R15.2 U5.7
N$10: J12.1 L6.2 R16.2
N$11: R17.1 R18.2 U6.7
N$12: J14.1 L7.2 R19.2
N$13: R20.1 R21.2 U7.7
N$14: J16.1 L8.2 R22.2
N$15: R23.1 R24.2 U8.7
N$16: J18.1 L9.2 R25.2
N$17: R26.1 R27.2 U9.7
N$18: J20.1 L10.2 R28.2
N$19: R29.1 R30.2 U10.7
N$20: J22.1 L11.2 R31.2
N$21: R32.1 R33.2 U11.7
N$22: J24.1 L12.2 R34.2
N$23: R35.1 R36.2 U12.7
N$24: J26.1 L13.2 R37.2
N$25: R38.1 R39.2 U13.7
N$26: J28.1 L14.2 R40.2
N$27: R41.1 R42.2 U14.7
N$28: J30.1 L15.2 R43.2
N$29: R44.1 R45.2 U15.7
N$30: J32.1 L16.2 R46.2
N$31: R47.1 R48.2 U16.7
N$32: J34.1 L17.2 R49.2
N$33: R50.1 R51.2 U17.7
N$34: J36.1 L18.2 R52.2
N$35: R53.1 R54.2 U18.7
N$36: J38.1 L19.2 R55.2
N$37: R56.1 R57.2 U19.7
N$38: J40.1 L20.2 R58.2
N$39: R59.1 R60.2 U20.7
N$40: J42.1 L21.2 R61.2
N$41: R62.1 R63.2 U21.7
N$42: J44.1 L22.2 R64.2
N$43: R65.1 R66.2 U22.7
N$44: J46.1 L23.2 R67.2
N$45: R68.1 R69.2 U23.7
N$46: J48.1 L24.2 R70.2
N$47: R71.1 R72.2 U24.7
N$48: J2.1 L1.2 R1.2
N$49: J50.1 L25.2 R73.2
N$50: R74.1 R75.2 U25.7
SIGOUT: D1.C J1.P$1 J2.4 L1.1 R1.1
SIGOUT1: D2.C J3.P$1 J4.4 L2.1 R4.1
SIGOUT2: D3.C J5.P$1 J6.4 L3.1 R7.1
SIGOUT3: D4.C J7.P$1 J8.4 L4.1 R10.1
SIGOUT4: D5.C J9.P$1 J10.4 L5.1 R13.1
SIGOUT5: D6.C J11.P$1 J12.4 L6.1 R16.1
SIGOUT6: D7.C J13.P$1 J14.4 L7.1 R19.1
SIGOUT7: D8.C J15.P$1 J16.4 L8.1 R22.1
SIGOUT8: D9.C J17.P$1 J18.4 L9.1 R25.1
SIGOUT9: D10.C J19.P$1 J20.4 L10.1 R28.1
SIGOUT10: D11.C J21.P$1 J22.4 L11.1 R31.1
SIGOUT11: D12.C J23.P$1 J24.4 L12.1 R34.1
SIGOUT12: D13.C J25.P$1 J26.4 L13.1 R37.1
SIGOUT13: D14.C J27.P$1 J28.4 L14.1 R40.1
SIGOUT14: D15.C J29.P$1 J30.4 L15.1 R43.1
SIGOUT15: D16.C J31.P$1 J32.4 L16.1 R46.1
SIGOUT16: D17.C J33.P$1 J34.4 L17.1 R49.1
SIGOUT17: D18.C J35.P$1 J36.4 L18.1 R52.1
SIGOUT18: D19.C J37.P$1 J38.4 L19.1 R55.1
SIGOUT19: D20.C J39.P$1 J40.4 L20.1 R58.1
SIGOUT20: D21.C J41.P$1 J42.4 L21.1 R61.1
SIGOUT21: D22.C J43.P$1 J44.4 L22.1 R64.1
SIGOUT22: D23.C J45.P$1 J46.4 L23.1 R67.1
SIGOUT23: D24.C J47.P$1 J48.4 L24.1 R70.1
SIGOUT24: D25.C J49.P$1 J50.4 L25.1 R73.1
VCOAX: C2.1 J2.3 R2.2 U1.8
VCOAX1: C3.1 J4.3 R5.2 U2.8
VCOAX2: C5.1 J6.3 R8.2 U3.8
VCOAX3: C7.1 J8.3 R11.2 U4.8
VCOAX4: C9.1 J10.3 R14.2 U5.8
VCOAX5: C11.1 J12.3 R17.2 U6.8
VCOAX6: C13.1 J14.3 R20.2 U7.8
VCOAX7: C15.1 J16.3 R23.2 U8.8
VCOAX8: C17.1 J18.3 R26.2 U9.8
VCOAX9: C19.1 J20.3 R29.2 U10.8
VCOAX10: C21.1 J22.3 R32.2 U11.8
VCOAX11: C23.1 J24.3 R35.2 U12.8
VCOAX12: C25.1 J26.3 R38.2 U13.8
VCOAX13: C27.1 J28.3 R41.2 U14.8
VCOAX14: C29.1 J30.3 R44.2 U15.8
VCOAX15: C31.1 J32.3 R47.2 U16.8
VCOAX16: C33.1 J34.3 R50.2 U17.8
VCOAX17: C35.1 J36.3 R53.2 U18.8
VCOAX18: C37.1 J38.3 R56.2 U19.8
VCOAX19: C39.1 J40.3 R59.2 U20.8
VCOAX20: C41.1 J42.3 R62.2 U21.8
VCOAX21: C43.1 J44.3 R65.2 U22.8
VCOAX22: C45.1 J46.3 R68.2 U23.8
VCOAX23: C47.1 J48.3 R71.2 U24.8
VCOAX24: C49.1 J50.3 R74.2 U25.8
VRAW: C1.1 J2.2 U1.1 U1.3 U1.4
VRAW1: C4.1 J4.2 U2.1 U2.3 U2.4
VRAW2: C6.1 J6.2 U3.1 U3.3 U3.4
VRAW3: C8.1 J8.2 U4.1 U4.3 U4.4
VRAW4: C10.1 J10.2 U5.1 U5.3 U5.4
VRAW5: C12.1 J12.2 U6.1 U6.3 U6.4
VRAW6: C14.1 J14.2 U7.1 U7.3 U7.4
VRAW7: C16.1 J16.2 U8.1 U8.3 U8.4
VRAW8: C18.1 J18.2 U9.1 U9.3 U9.4
VRAW9: C20.1 J20.2 U10.1 U10.3 U10.4
VRAW10: C22.1 J22.2 U11.1 U11.3 U11.4
VRAW11: C24.1 J24.2 U12.1 U12.3 U12.4
VRAW12: C26.1 J26.2 U13.1 U13.3 U13.4
VRAW13: C28.1 J28.2 U14.1 U14.3 U14.4
VRAW14: C30.1 J30.2 U15.1 U15.3 U15.4
VRAW15: C32.1 J32.2 U16.1 U16.3 U16.4
VRAW16: C34.1 J34.2 U17.1 U17.3 U17.4
VRAW17: C36.1 J36.2 U18.1 U18.3 U18.4
VRAW18: C38.1 J38.2 U19.1 U19.3 U19.4
VRAW19: C40.1 J40.2 U20.1 U20.3 U20.4
VRAW20: C42.1 J42.2 U21.1 U21.3 U21.4
VRAW21: C44.1 J44.2 U22.1 U22.3 U22.4
VRAW22: C46.1 J46.2 U23.1 U23.3 U23.4
VRAW23: C48.1 J48.2 U24.1 U24.3 U24.4
VRAW24: C50.1 J50.2 U25.1 U25.3 U25.4